# EAGLE board avr (EAGLE 6.1)
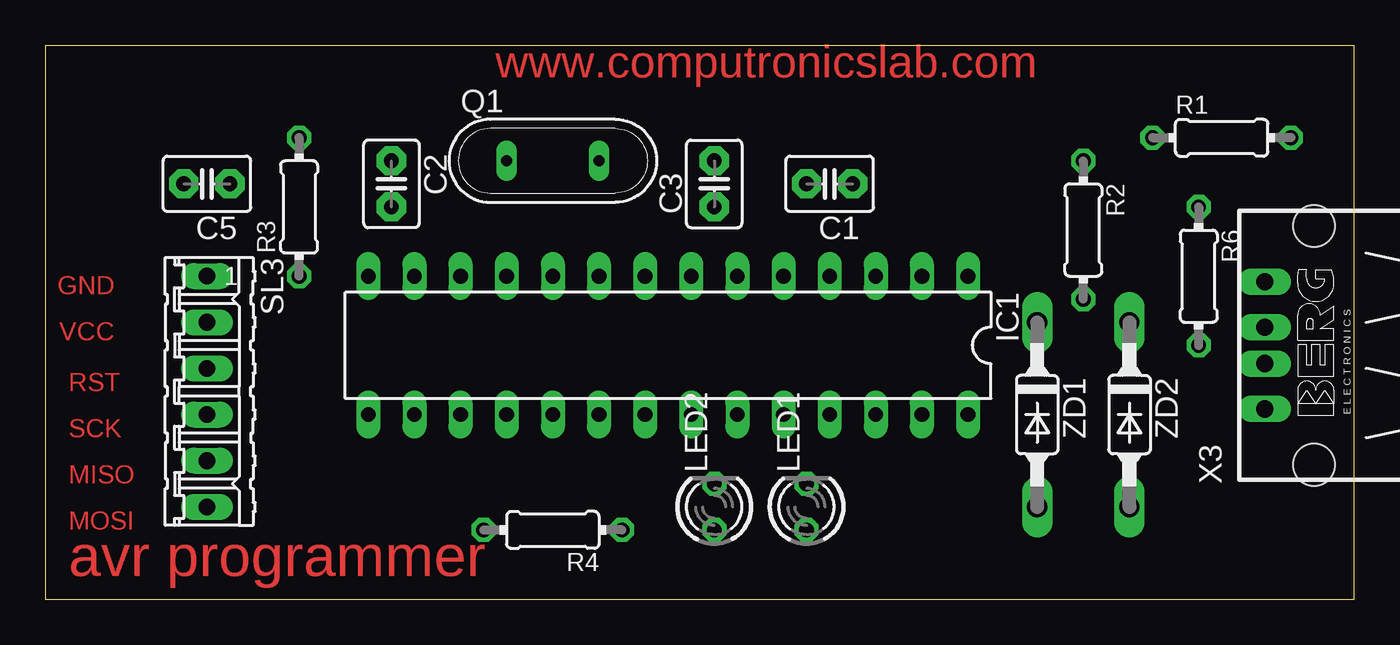
[diagram p0: board, top side]
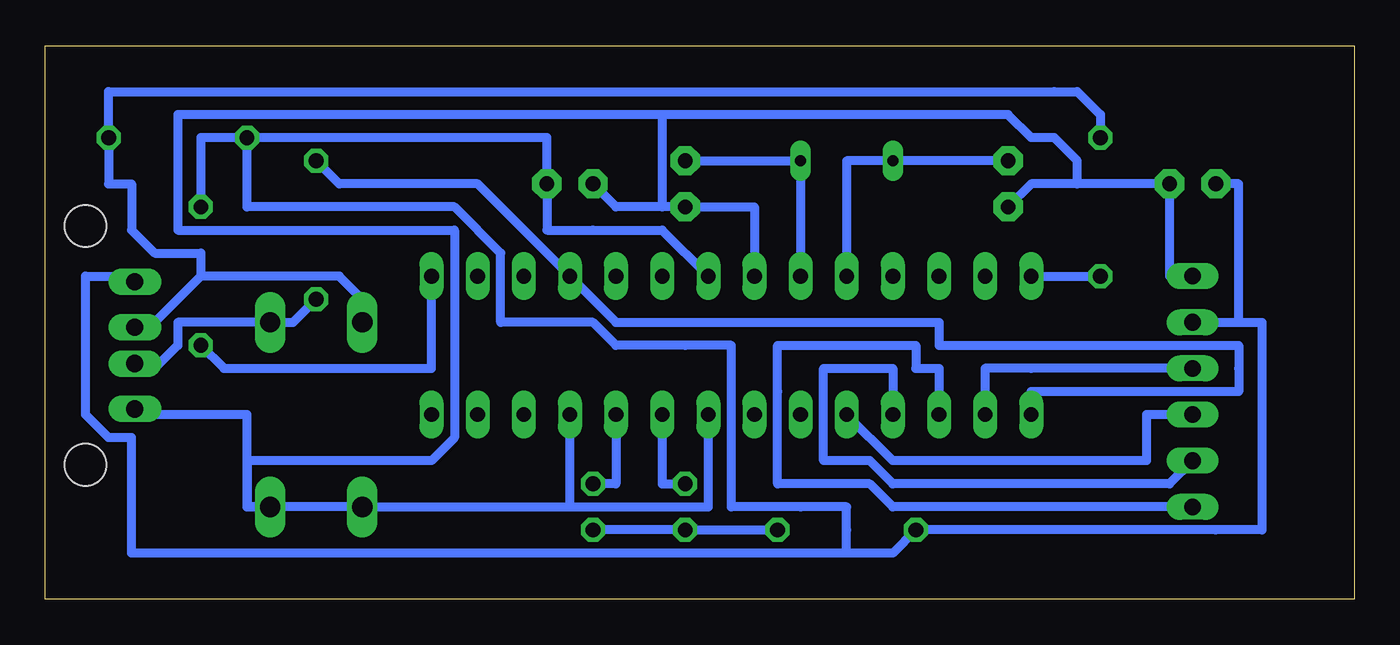
[diagram p1: board, bottom side, seen from below]

Size 72.06 x 30.47 mm. Coordinates in mm from the lower left corner, seen from the top.
Outline: 0,0 72.06,0 72.06,30.47 0,30.47 0,0
Copper layers (1*16): Top 0.035mm / dielectric 1.5mm / Bottom 0.035mm
Design rules: minimum track width 20mil, minimum drill 24mil, track to track 8mil, track to pad 8mil, pad to pad 8mil, via to via 8mil, smd to smd 8mil, copper to edge 40mil, drill to drill 8mil, minimum pad ring 10mil, minimum via ring 8mil, stop-mask expansion 4mil, vias tented up to drill 0mil, thermal gap 10mil

## Footprints (pad centres in the part's own frame; a part is rotated, then mirrored left to right if it is on the bottom)
C2.5-3 = drill 0.813 pad 1.6 octagon: 1 -1.27,0; 2 1.27,0
DIL28-3 = drill 0.813 long: 1 -16.51,-3.81; 2 -13.97,-3.81; 3 -11.43,-3.81; 4 -8.89,-3.81; 5 -6.35,-3.81; 6 -3.81,-3.81; 7 -1.27,-3.81; 8 1.27,-3.81; 9 3.81,-3.81; 10 6.35,-3.81; 11 8.89,-3.81; 12 11.43,-3.81; 13 13.97,-3.81; 14 16.51,-3.81; 15 16.51,3.81; 16 13.97,3.81; 17 11.43,3.81; 18 8.89,3.81; 19 6.35,3.81; 20 3.81,3.81; 21 1.27,3.81; 22 -1.27,3.81; 23 -3.81,3.81; 24 -6.35,3.81; 25 -8.89,3.81; 26 -11.43,3.81; 27 -13.97,3.81; 28 -16.51,3.81
LED3MM = drill 0.813 octagon: A -1.27,0; K 1.27,0
QS = drill 0.61 long: 1 -2.54,0; 2 2.54,0
0204/7 = drill 0.813 octagon: 1 -3.81,0; 2 3.81,0
06P = drill 0.914 long: 1 -6.35,0; 2 -3.81,0; 3 -1.27,0; 4 1.27,0; 5 3.81,0; 6 6.35,0
PN87520 = drill 0.95 long: 1 -3.5,2.71; 2 -1,2.71; 3 1,2.71; 4 3.5,2.71 | hole 2.3: -6.57,0; 6.57,0
SOD81 = drill 1.118 long: A 5.08,0; C -5.08,0

## Placement (x,y rotation side)
C1  0.1uf  [C2.5-3]  43.18,22.86 180 top
C2  22pf  [C2.5-3]  19.05,22.86 270 top
C3  22pf  [C2.5-3]  36.83,22.86 90 top
C5  0.1uf  [C2.5-3]  8.89,22.86 180 top
IC1  QT9701BD  [DIL28-3]  34.29,13.97 180 top
LED1  3mm  [LED3MM]  41.91,5.08 90 top
LED2  5mm  [LED3MM]  36.83,5.08 90 top
Q1  12 MHZ  [QS]  27.94,24.13 0 top
R1  2.6k  [0204/7]  64.77,25.4 0 top
R2  70E  [0204/7]  57.15,20.32 270 top
R3  70E  [0204/7]  13.97,21.59 90 top
R4  1K  [0204/7]  27.94,3.81 180 top
R6  10K  [0204/7]  63.5,17.78 270 top
SL3  [06P]  8.89,11.43 270 top
X3  [PN87520]  69.85,13.97 90 top
ZD1  3.6v  [SOD81]  54.61,10.16 270 top
ZD2  3.6v  [SOD81]  59.69,10.16 270 top

## Library data of the parts
C1-C3 C5 = capacitor-wima
IC1 = quantum-research-group; OC_FARNELL: unknown; OC_NEWARK: unknown
LED1 LED2 = led
Q1 = special
R1-R4 R6 = resistor
SL3 = con-amp-quick; OC_FARNELL: unknown; OC_NEWARK: unknown
X3 = con-berg; OC_FARNELL: unknown; OC_NEWARK: unknown
ZD1 ZD2 = diode

## Nets
N$1: C3.2 IC1.9 Q1.2
N$2: C2.1 IC1.10 Q1.1
N$3: C1.2 C2.2 C3.1 C5.1 IC1.8 IC1.22 IC1.25 SL3.1 X3.1 ZD1.A ZD2.A
N$4: IC1.24 LED1.K
N$5: IC1.23 LED2.K
N$6: R2.2 X3.2 ZD2.C
N$8: IC1.4 IC1.15 R2.1
N$9: R1.2 R3.2 X3.3 ZD1.C
N$10: LED1.A LED2.A R4.1
N$11: IC1.14 R3.1
N$12: IC1.1 R6.2
N$13: IC1.17 SL3.6
N$14: IC1.16 SL3.3
N$15: IC1.18 SL3.5
N$17: C1.1 C5.2 IC1.7 R1.1 R4.2 R6.1 SL3.2 X3.4
N$24: IC1.19 SL3.4

## Tracks (layer width: path | path; a pad name or v marks a point on that pad's centre or on a via)
N$1
  Bottom 0.508: C3.2 Q1.2 IC1.9
N$2
  Bottom 0.508: C2.1 Q1.1 27.94,24.13 IC1.10
N$3
  Bottom 0.508: 60.96,5.08 60.96,10.16 66.04,10.16 X3.1 | ZD2.A 60.96,5.08 | IC1.22 35.56,5.08 43.18,5.08 | 43.18,5.08 ZD1.A ZD2.A | 43.18,5.08 IC1.25 | IC1.8 33.02,21.59 C3.1 38.1,21.59 | C1.2 40.64,21.59 38.1,21.59 | SL3.1 10.16,17.78 C5.1 15.24,22.86 | C2.2 17.78,22.86 15.24,22.86 | 38.1,26.67 38.1,21.59 | 38.1,26.67 19.05,26.67 17.78,25.4 16.51,25.4 15.24,24.13 15.24,22.86 | 60.96,5.08 60.96,7.62 57.15,7.62 50.8,7.62 49.53,8.89 49.53,20.32 64.77,20.32 64.77,26.67 38.1,26.67 | 60.96,5.08 ZD2.A
N$4
  Bottom 0.508: LED1.K 40.64,6.35 IC1.24
N$5
  Bottom 0.508: LED2.K 38.1,6.35 IC1.23
N$6
  Bottom 0.508: R2.2 58.42,15.24 ZD2.C 64.77,15.24 64.77,13.97 66.04,12.7 X3.2
N$8
  Bottom 0.508: IC1.15 17.78,11.43 16.51,11.43 7.62,11.43 6.35,11.43 6.35,12.7 6.35,13.97 22.86,13.97 22.86,15.24 27.94,15.24 40.64,15.24 IC1.4 48.26,22.86 55.88,22.86 R2.1
N$9
  Bottom 0.508: 63.5,17.78 66.04,15.24 X3.3 | 63.5,17.78 55.88,17.78 54.61,16.51 ZD1.C | R3.2 13.97,26.67 15.24,27.94 16.51,27.94 68.58,27.94 R1.2 68.58,22.86 67.31,22.86 67.31,20.32 66.04,19.05 63.5,19.05 63.5,17.78
N$10
  Bottom 0.508: R4.1 LED2.A LED1.A
N$11
  Bottom 0.508: IC1.14 R3.1
N$12
  Bottom 0.508: IC1.1 50.8,12.7 62.23,12.7 R6.2
N$13
  Bottom 0.508: IC1.17 22.86,12.7 24.13,12.7 24.13,13.97 29.21,13.97 31.75,13.97 31.75,11.43 31.75,6.35 26.67,6.35 25.4,5.08 SL3.6
N$14
  Bottom 0.508: IC1.16 20.32,12.7 17.78,12.7 SL3.3
N$15
  Bottom 0.508: IC1.18 25.4,12.7 29.21,12.7 29.21,7.62 26.67,7.62 25.4,6.35 10.16,6.35 SL3.5
N$17
  Bottom 0.508: R6.1 63.5,25.4 R1.1 | IC1.7 38.1,20.32 41.91,20.32 44.45,20.32 C1.1 44.45,25.4 R1.1 | SL3.2 6.35,15.24 | 6.35,15.24 5.08,15.24 5.08,6.35 5.08,3.81 7.62,3.81 R4.2 25.4,2.54 27.94,2.54 | 27.94,2.54 66.04,2.54 67.31,2.54 67.31,8.89 68.58,8.89 69.85,10.16 69.85,17.78 67.31,17.78 X3.4 | C5.2 6.35,22.86 6.35,17.78 6.35,15.24 | R1.1 60.96,21.59 49.53,21.59 46.99,19.05 46.99,15.24 41.91,15.24 40.64,13.97 36.83,13.97 34.29,13.97 34.29,11.43 34.29,5.08 30.48,5.08 27.94,5.08 27.94,3.81 27.94,2.54
N$24
  Bottom 0.508: IC1.19 25.4,7.62 11.43,7.62 11.43,10.16 SL3.4

## Text on the board
Top: www.computronicslab.com | GND | VCC | RST | SCK | MISO | MOSI | avr programmer